# EAGLE board ME433_2017_CHEHADE (EAGLE 8.1.0)
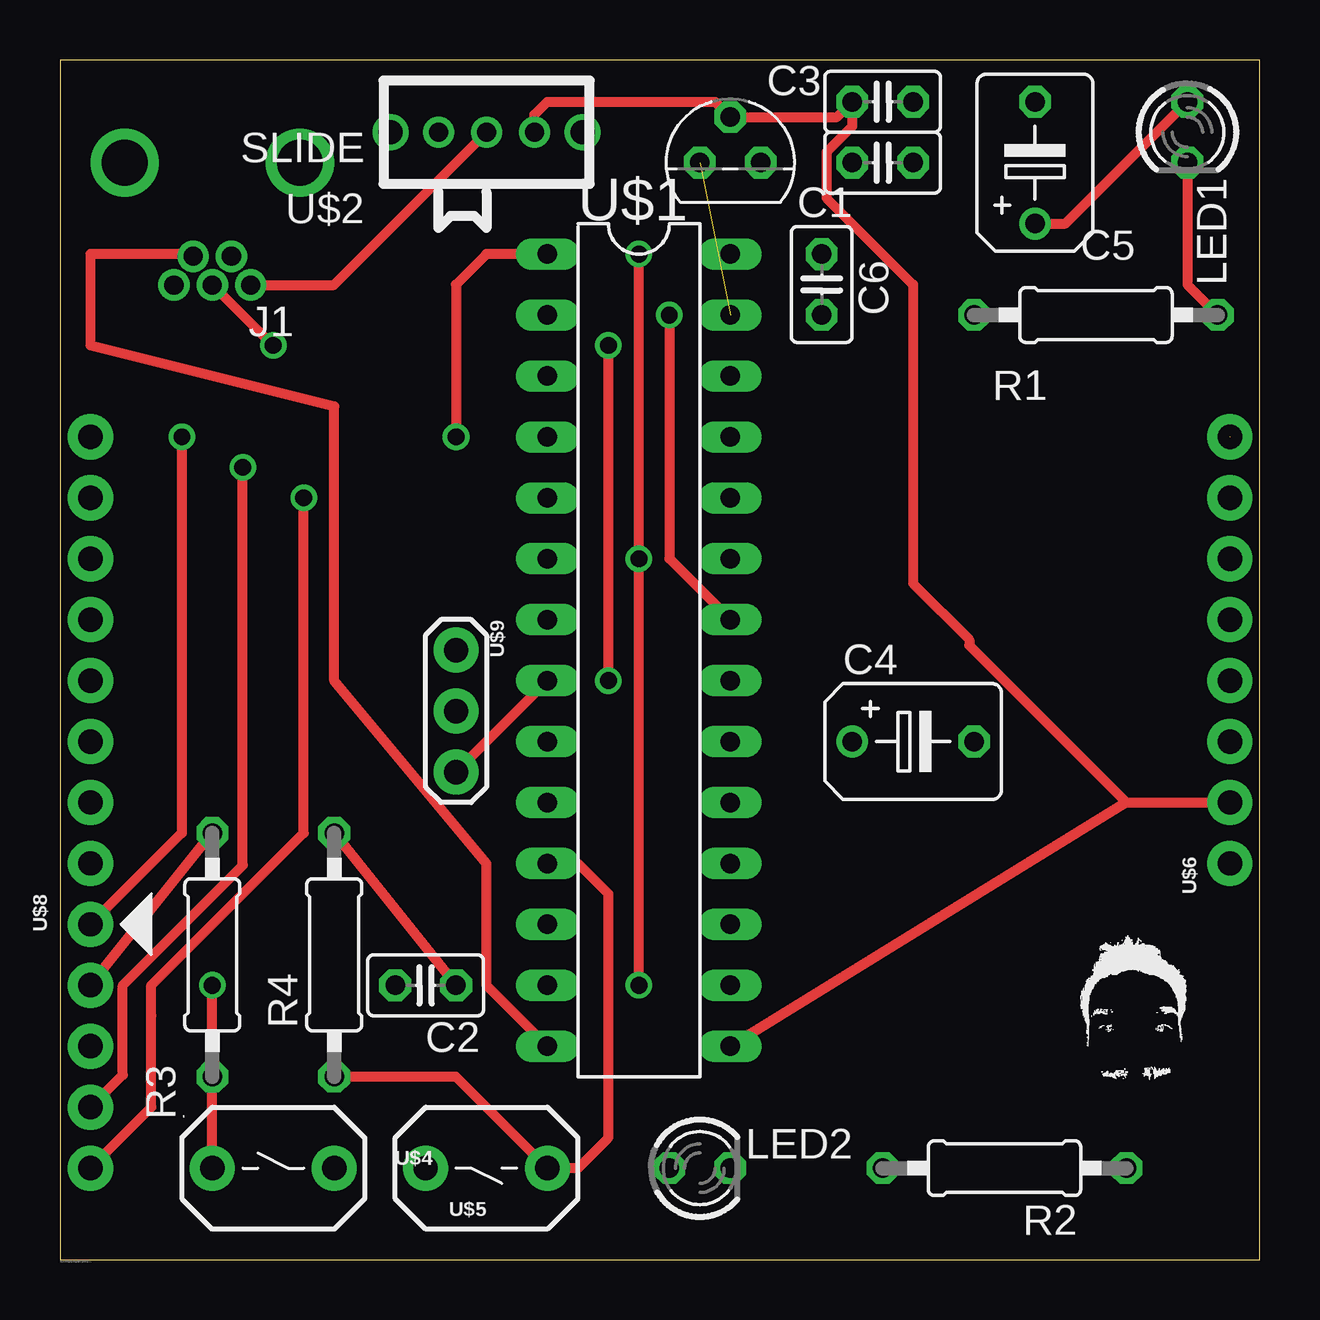
[diagram p0: board, top side]
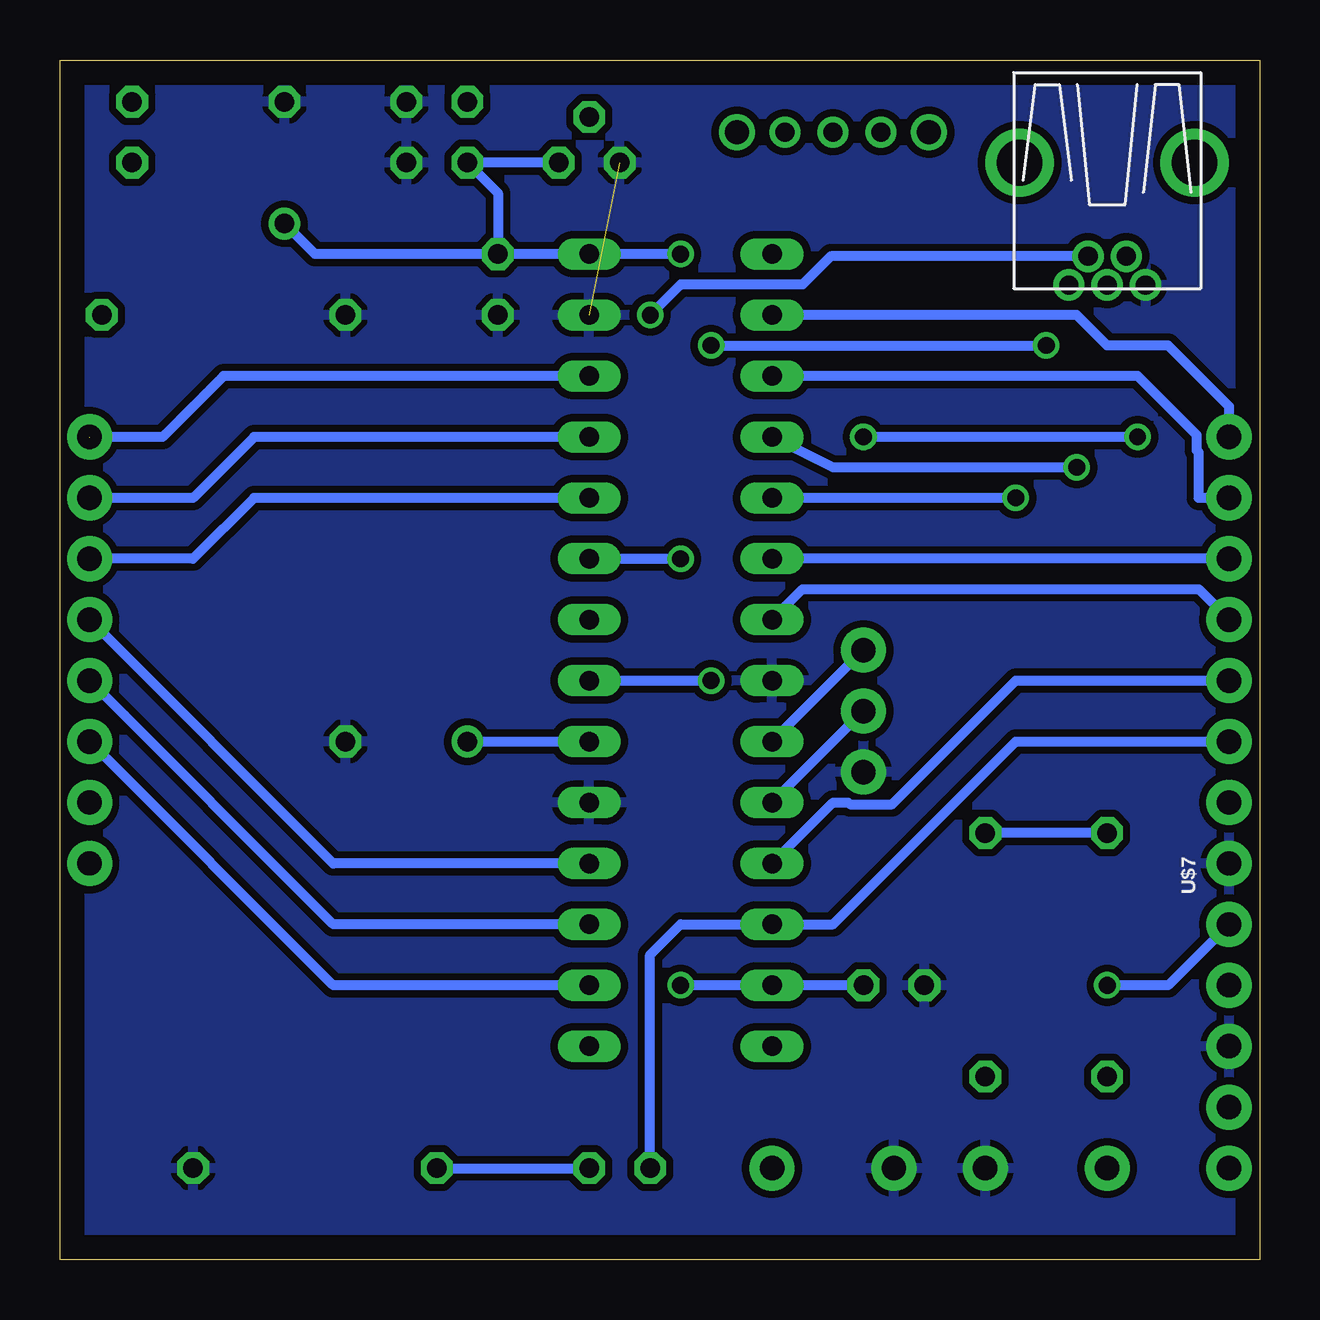
[diagram p1: board, bottom side, seen from below]

Size 50 x 50 mm. Coordinates in mm from the lower left corner, seen from the top.
Outline: 0,0 50,0 50,50 0,50 0,0
Copper layers (1*16): Top 0.035mm / dielectric 1.5mm / Bottom 0.035mm
Design rules "default": minimum track width 10mil, minimum drill 24mil, track to track 8mil, track to pad 8mil, pad to pad 8mil, via to via 8mil, smd to smd 8mil, copper to edge 40mil, drill to drill 8mil, minimum pad ring 10mil, minimum via ring 8mil, stop-mask expansion 4mil, vias tented up to drill 0mil, thermal gap 10mil

## Footprints (pad centres in the part's own frame; a part is rotated, then mirrored left to right if it is on the bottom)
C025-025X050 = drill 0.813 octagon: 1 -1.27,0; 2 1.27,0
B45181B = drill 0.813: + -2.54,0 | drill 0.813 octagon: - 2.54,0
USB-MB-H = drill 0.8: D+ 5.1,0; D- 3.9,0.8; GND 5.1,-1.6; ID 3.9,-0.8; VBUS 5.1,1.6 | drill 1.9: P$6 0,-3.65; P$7 0,3.65
LED3MM = drill 0.813 octagon: A -1.27,0; K 1.27,0
0207/10 = drill 0.813 octagon: 1 -5.08,0; 2 5.08,0
DIL28-3 = drill 0.813 long: 1 -16.51,-3.81; 2 -13.97,-3.81; 3 -11.43,-3.81; 4 -8.89,-3.81; 5 -6.35,-3.81; 6 -3.81,-3.81; 7 -1.27,-3.81; 8 1.27,-3.81; 9 3.81,-3.81; 10 6.35,-3.81; 11 8.89,-3.81; 12 11.43,-3.81; 13 13.97,-3.81; 14 16.51,-3.81; 15 16.51,3.81; 16 13.97,3.81; 17 11.43,3.81; 18 8.89,3.81; 19 6.35,3.81; 20 3.81,3.81; 21 1.27,3.81; 22 -1.27,3.81; 23 -3.81,3.81; 24 -6.35,3.81; 25 -8.89,3.81; 26 -11.43,3.81; 27 -13.97,3.81; 28 -16.51,3.81
SLIDE = drill 0.8: 1 -2,0; 2 0,0; 3 2,0 | drill 1: P$1 -4,0; P$2 4,0
TO92 = drill 0.813 octagon: 1 -1.27,0; 2 0,1.905; 3 1.27,0
PB = drill 1.016 pad 1.88: 1 -2.54,0; 2 2.54,0
1X08 = drill 1.016 pad 1.88: 1 0,0; 2 2.54,0; 3 5.08,0; 4 7.62,0; 5 10.16,0; 6 12.7,0; 7 15.24,0; 8 17.78,0
1X05 = drill 1.016 pad 1.88: 1 0,0; 2 2.54,0; 3 5.08,0; 4 7.62,0; 5 10.16,0
OSC = drill 1.016 pad 1.88: 1 -2.54,0; 2 0,0; 3 2.54,0

## Placement (x,y rotation side)
C1  0.1uF  [C025-025X050]  34.29,45.72 0 top
C2  0.1uF  [C025-025X050]  15.24,11.43 180 top
C3  0.1uF  [C025-025X050]  34.29,48.26 0 top
C4  10uF  [B45181B]  35.56,21.59 0 top
C5  10uF  [B45181B]  40.64,45.72 90 top
C6  0.1uF  [C025-025X050]  31.75,40.64 270 top
J1  USB-MB-H  [USB-MB-H]  6.35,45.72 270 top
LED1  RED  [LED3MM]  46.99,46.99 270 top
LED2  GREEN  [LED3MM]  26.67,3.81 0 top
R1  330  [0207/10]  43.18,39.37 0 top
R2  330  [0207/10]  39.37,3.81 180 top
R3  10k  [0207/10]  6.35,12.7 90 top
R4  10k  [0207/10]  11.43,12.7 90 top
U$1  PIC32MX250F128B  [DIL28-3]  24.13,25.4 270 top
U$2  SLIDE  [SLIDE]  17.78,46.99 180 top
U$3  MCP1702  [TO92]  27.94,45.72 0 top
U$4  RESET  [PB]  8.89,3.81 0 top
U$5  USER  [PB]  17.78,3.81 180 top
U$6  CONN_08  [1X08]  48.77,16.51 90 top
U$7  CONN_08  [1X08]  1.27,16.51 90 bottom
U$8  CONN_05  [1X05]  1.27,13.97 270 top
U$9  8 MHz  [OSC]  16.51,22.86 270 top

## Library data of the parts
C1-C6 = resistor
J1 R1-R4 U$1-U$9 = ME433_2017_CHEHADE
LED1 LED2 = led

## Nets
+3V3: C1.1 C2.1 C5.+ C6.1 LED1.A R3.2 R4.2 U$1.13 U$1.23 U$1.28 U$3.3 U$8.2
+5V: C3.1 U$1.15 U$2.1 U$3.2 U$6.2
A0: U$1.2 U$7.8
A1: U$1.3 U$7.7
A4/LED: LED2.A U$1.12 U$7.3
B2: U$1.6 U$7.6
B3: U$1.7 U$7.5
B4/USER: R4.1 U$1.11 U$5.1 U$7.4
B7: U$1.16 U$6.3
B8: U$1.17 U$6.4
B9: U$1.18 U$6.5
B13: U$1.24 U$6.6
B14: U$1.25 U$6.7
B15: U$1.26 U$6.8
D+: J1.D+ U$1.21
D-: J1.D- U$1.22
GND: C1.2 C2.2 C3.2 C4.- C5.- C6.2 J1.GND R1.1 R2.1 U$1.8 U$1.19 U$1.27 U$3.1 U$4.2 U$5.2 U$7.1 U$8.3 U$9.3
MCLR: R3.1 U$1.1 U$4.1 U$8.1
N$1: J1.VBUS U$2.2
N$2: C4.+ U$1.20
N$3: LED1.K R1.2
N$4: U$1.9 U$9.1
N$5: U$1.10 U$9.2
N$6: LED2.K R2.2
N$12: U$6.1
PGC: U$1.5 U$8.5
PGD: U$1.4 U$8.4
USBID: J1.ID U$1.14

## Tracks (layer width: path | path; a pad name or v marks a point on that pad's centre or on a via)
+3V3  (via drill 0.7)
  Top 0.406: C5.+ 41.91,43.18 LED1.A | v24.13,11.43 v24.13,29.21 v24.13,41.91 | U$8.2 R3.2 | R4.2 C2.1
  Bottom 0.406: R3.2 R4.2 | C2.1 U$1.13 v24.13,11.43 | U$3.3 C1.1 31.75,44.45 C6.1 | C6.1 39.37,41.91 C5.+ | U$1.23 v24.13,29.21 | v24.13,41.91 U$1.28 C6.1
+5V
  Top 0.406: 44.45,19.05 37.9,25.6 37.9,25.84 35.56,28.18 35.56,40.64 31.95,44.25 31.95,46.16 33.02,47.23 C3.1 32.38,47.62 U$3.2 27.3,48.26 20.32,48.26 19.78,47.72 U$2.1 | 44.45,19.05 U$1.15 | 44.45,19.05 U$6.2
A0
  Bottom 0.406: U$7.8 1.27,35.56 3.81,38.1 6.35,38.1 7.62,39.37 U$1.2
A1
  Bottom 0.406: U$7.7 2.54,31.75 2.54,33.66 2.62,33.73 2.62,34.37 5.08,36.83 U$1.3
A4/LED
  Bottom 0.406: LED2.A 25.4,12.7 24.13,13.97 U$1.12 17.78,13.97 10.16,21.59 U$7.3
B2
  Bottom 0.406: U$7.6 U$1.6
B3
  Bottom 0.406: U$7.5 2.54,27.94 19.05,27.94 U$1.7
B4/USER
  Top 0.406: U$1.11 21.59,16.51 22.86,15.24 22.86,5.08 21.59,3.81 U$5.1 16.51,7.62 R4.1
  Bottom 0.406: U$1.11 17.78,19.05 17.14,19.05 17.07,18.97 15.32,18.97 10.16,24.13 U$7.4
B7
  Bottom 0.406: U$1.16 38.61,11.43 U$6.3
B8
  Bottom 0.406: U$1.17 38.61,13.97 U$6.4
B9
  Bottom 0.406: U$6.5 38.61,16.51 U$1.18
B13
  Bottom 0.406: U$1.24 41.91,31.75 44.45,29.21 U$6.6
B14
  Bottom 0.406: U$1.25 41.91,34.29 44.45,31.75 U$6.7
B15  (1 unrouted)
  Bottom 0.406: U$1.26 43.18,36.83 45.72,34.29 U$6.8
D+  (via drill 0.7)
  Top 0.406: v22.86,24.13 v22.86,38.1 | v8.89,38.1 6.37,40.62 J1.D+
  Bottom 0.406: U$1.21 v22.86,24.13 | v22.86,38.1 v8.89,38.1
D-  (via drill 0.7)
  Top 0.406: v25.4,39.37 25.4,29.21 U$1.22
  Bottom 0.406: J1.D- 17.87,41.82 19.05,40.64 24.13,40.64 v25.4,39.37
GND  (1 unrouted)
  Top 0.406: U$9.3 U$1.8
  pour Bottom (isolate 0.305): 0,50 0,0 50,0 49.53,1.27 51.27,50
MCLR  (via drill 0.7)
  Top 0.406: U$4.1 R3.1 v6.35,11.43 | U$1.1 17.78,41.91 16.51,40.64 v16.51,34.29 | v5.08,34.29 5.08,17.78 U$8.1
  Bottom 0.406: v5.08,34.29 v16.51,34.29 | U$8.1 3.81,11.43 v6.35,11.43
N$1
  Top 0.406: J1.VBUS 11.41,40.62 U$2.2
N$2
  Bottom 0.406: C4.+ U$1.20
N$3
  Top 0.406: LED1.K 46.99,40.64 R1.2
N$4
  Bottom 0.406: U$9.1 U$1.9
N$5
  Bottom 0.406: U$1.10 U$9.2
N$6
  Bottom 0.406: R2.2 LED2.K
PGC  (via drill 0.7)
  Top 0.406: U$8.5 3.81,6.35 3.81,10.16 3.81,11.43 10.16,17.78 v10.16,31.75
  Bottom 0.406: v10.16,31.75 U$1.5
PGD  (via drill 0.7)
  Top 0.406: U$8.4 2.62,7.7 2.62,11.43 7.62,16.43 v7.62,33.02
  Bottom 0.406: v7.62,33.02 17.78,33.02 U$1.4
USBID
  Top 0.406: U$1.14 17.78,11.43 17.78,16.51 11.43,24.13 11.43,35.56 1.27,38.1 1.27,41.91 5.46,41.91 J1.ID

## Text on the board
tPlace: /Users/Philip/Desktop/IMG_2132 3.bmp | /Users/Philip/Desktop/THE ONE.bmp